# EAGLE board bb2 (EAGLE 6.5.0)
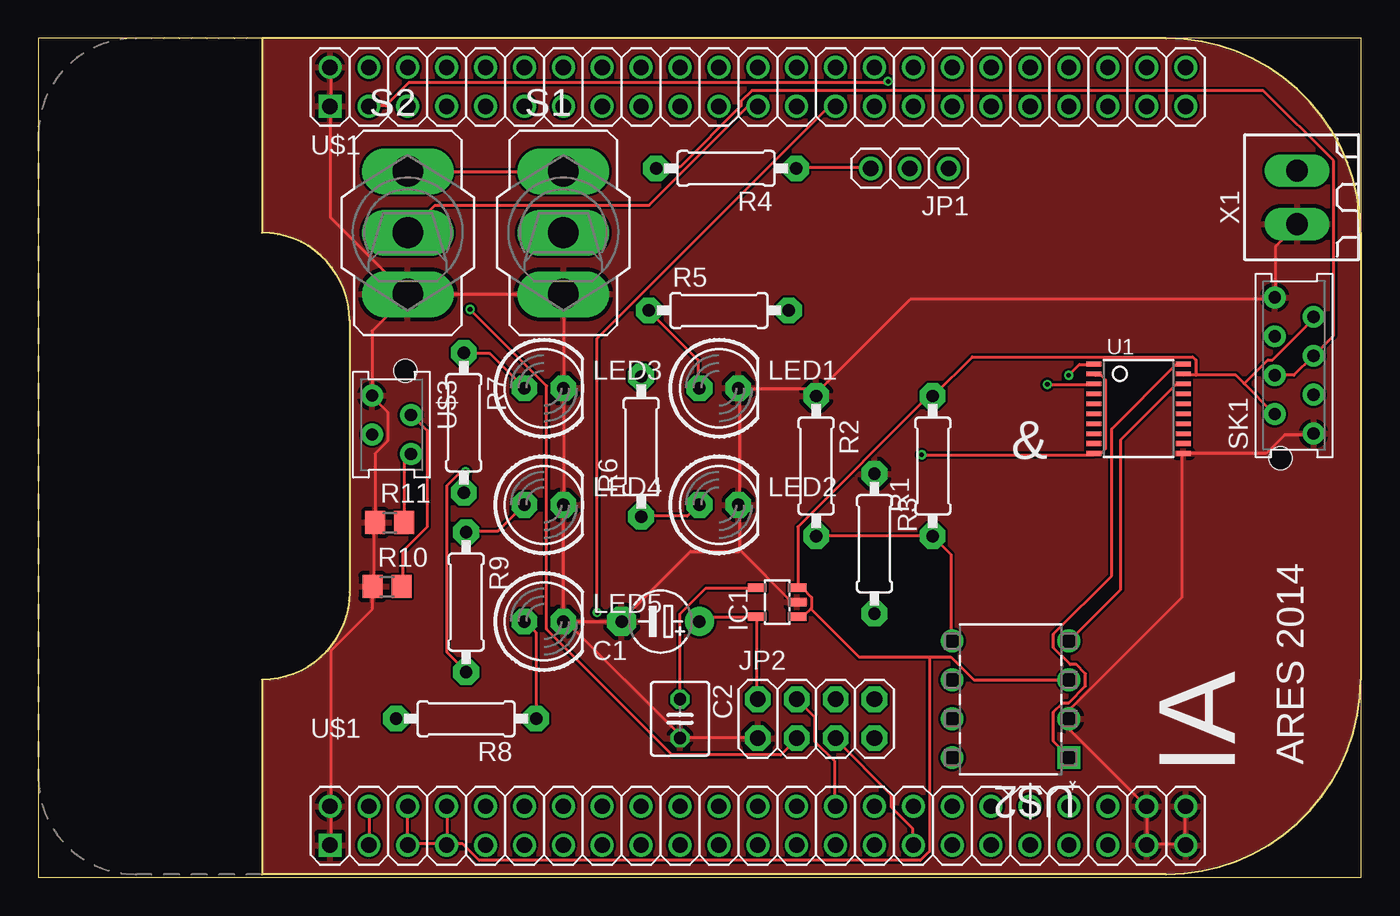
[diagram p0: board, top side]
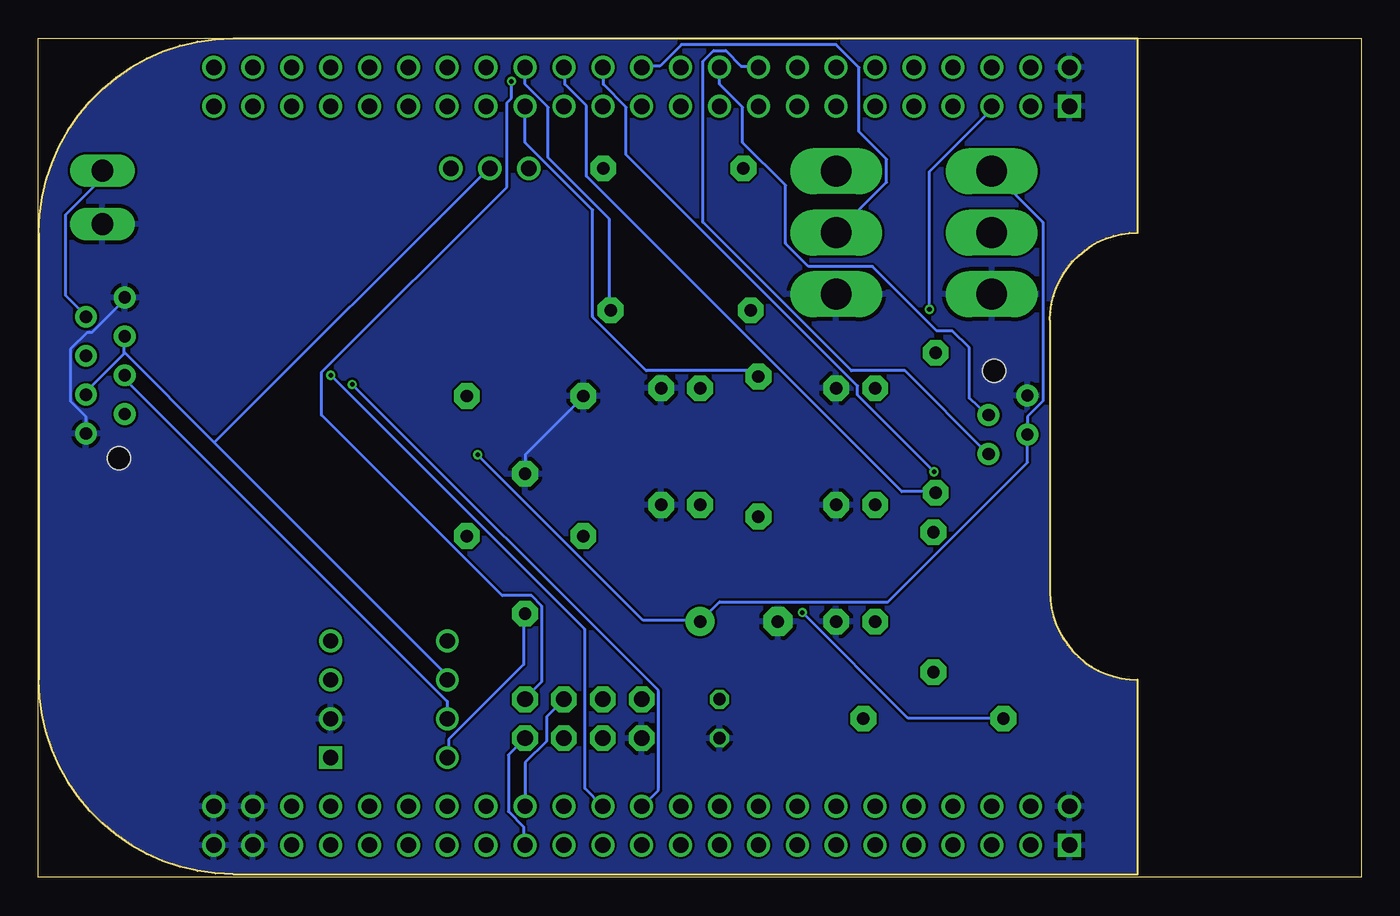
[diagram p1: board, bottom side, seen from below]

Size 86.4 x 54.81 mm. Coordinates in mm from the lower left corner, seen from the top.
Outline: 0,0 86.4,0 86.4,54.8 0,54.8 0,0
Copper layers (1*16): Top 0.035mm / dielectric 1.6mm / Bottom 0.035mm
Design rules "dipole *": minimum track width 0.2mm, minimum drill 0.3mm, track to track 0.15mm, track to pad 0.15mm, pad to pad 0.15mm, via to via 0.15mm, smd to smd 0.01mm, copper to edge 0.01mm, drill to drill 0.01mm, minimum pad ring 0.15mm, minimum via ring 0.15mm, stop-mask expansion 1mil, vias tented up to drill 0mil, thermal gap 10mil

## Footprints (pad centres in the part's own frame; a part is rotated, then mirrored left to right if it is on the bottom)
E5-4 = drill 0.813 pad 1.905: + -2.54,0 | drill 0.813 pad 1.905 octagon: - 2.54,0
C025-040X050 = drill 0.813 octagon: 1 -1.27,0; 2 1.27,0
SOT23-5 = smd 0.55 x 1.2: 1 -0.95,-1.3; 2 0,-1.3; 3 0.95,-1.3; 4 0.95,1.3; 5 -0.95,1.3
1X03 = drill 1.016: 1 -2.54,0; 2 0,0; 3 2.54,0
2X04 = drill 1.016 pad 1.676 octagon: 1 -3.81,-1.27; 2 -3.81,1.27; 3 -1.27,-1.27; 4 -1.27,1.27; 5 1.27,-1.27; 6 1.27,1.27; 7 3.81,-1.27; 8 3.81,1.27
LED5MM = drill 0.813 pad 1.676 octagon: A -1.27,0; K 1.27,0
0207/9 = drill 0.813 pad 1.676 octagon: 1 -4.572,0; 2 4.572,0
R0805 = smd 1.3 x 1.5: 1 -0.95,0; 2 0.95,0
320-916 = drill 2.007 long: 1 0,4.013; 2 0,0; 3 0,-4.013
AMP-215079-8 = drill 0.8 pad 1.422: 1 0,-1.27; 2 1.27,1.27; 3 2.54,-1.27; 4 3.81,1.27; 5 5.08,-1.27; 6 6.35,1.27; 7 7.62,-1.27; 8 8.89,1.27 | hole 1.5: -1.62,0.905
TSSOP20 = smd 0.305 x 0.991: 1 -2.925,-2.918; 2 -2.275,-2.918; 3 -1.625,-2.918; 4 -0.975,-2.918; 5 -0.325,-2.918; 6 0.325,-2.918; 7 0.975,-2.918; 8 1.625,-2.918; 9 2.275,-2.918; 10 2.925,-2.918; 11 2.925,2.918; 12 2.275,2.918; 13 1.625,2.918; 14 0.975,2.918; 15 0.325,2.918; 16 -0.325,2.918; 17 -0.975,2.918; 18 -1.625,2.918; 19 -2.275,2.918; 20 -2.925,2.918
BEAGLEBONE_SHIELD = drill 1 square: 1 4.445,19.05; 47 52.705,19.05 | drill 1: 2 1.905,19.05; 3 4.445,21.59; 4 1.905,21.59; 5 4.445,24.13; 6 1.905,24.13; 7 4.445,26.67; 8 1.905,26.67; 9 4.445,29.21; 10 1.905,29.21; 11 4.445,31.75; 12 1.905,31.75; 13 4.445,34.29; 14 1.905,34.29; 15 4.445,36.83; 16 1.905,36.83; 17 4.445,39.37; 18 1.905,39.37; 19 4.445,41.91; 20 1.905,41.91; 21 4.445,44.45; 22 1.905,44.45; 23 4.445,46.99; 24 1.905,46.99; 25 4.445,49.53; 26 1.905,49.53; 27 4.445,52.07; 28 1.905,52.07; 29 4.445,54.61; 30 1.905,54.61; 31 4.445,57.15; 32 1.905,57.15; 33 4.445,59.69; 34 1.905,59.69; 35 4.445,62.23; 36 1.905,62.23; 37 4.445,64.77; 38 1.905,64.77; 39 4.445,67.31; 40 1.905,67.31; 41 4.445,69.85; 42 1.905,69.85; 43 4.445,72.39; 44 1.905,72.39; 45 4.445,74.93; 46 1.905,74.93; 48 50.165,19.05; 49 52.705,21.59; 50 50.165,21.59; 51 52.705,24.13; 52 50.165,24.13; 53 52.705,26.67; 54 50.165,26.67; 55 52.705,29.21; 56 50.165,29.21; 57 52.705,31.75; 58 50.165,31.75; 59 52.705,34.29; 60 50.165,34.29; 61 52.705,36.83; 62 50.165,36.83; 63 52.705,39.37; 64 50.165,39.37; 65 52.705,41.91; 66 50.165,41.91; 67 52.705,44.45; 68 50.165,44.45; 69 52.705,46.99; 70 50.165,46.99; 71 52.705,49.53; 72 50.165,49.53; 73 52.705,52.07; 74 50.165,52.07; 75 52.705,54.61; 76 50.165,54.61; 77 52.705,57.15; 78 50.165,57.15; 79 52.705,59.69; 80 50.165,59.69; 81 52.705,62.23; 82 50.165,62.23; 83 52.705,64.77; 84 50.165,64.77; 85 52.705,67.31; 86 50.165,67.31; 87 52.705,69.85; 88 50.165,69.85; 89 52.705,72.39; 90 50.165,72.39; 91 52.705,74.93; 92 50.165,74.93
DIP254P762X432-8 = drill 0.991 square: 1 -7.62,7.62 | drill 0.991: 2 -7.62,5.08; 3 -7.62,2.54; 4 -7.62,0; 5 0,0; 6 0,2.54; 7 0,5.08; 8 0,7.62
AMP-215079-4 = drill 0.8 pad 1.422: 1 0,0; 2 1.27,2.54; 3 2.54,0; 4 3.81,2.54 | hole 1.5: -1.62,2.175
180G-2 = drill 1.422 long: 1 -1.75,0; 2 1.75,0

## Placement (x,y rotation side)
C1  2.2u  [E5-4]  40.64,16.71 180 top
C2  470p  [C025-040X050]  41.91,10.36 270 top
IC1  MIC5219BM5  [SOT23-5]  48.26,17.98 90 top
JP1  [1X03]  56.91,46.32 180 top
JP2  [2X04]  50.8,10.36 0 top
LED1  [LED5MM]  44.45,31.95 0 top
LED2  [LED5MM]  44.45,24.33 0 top
LED3  [LED5MM]  33.02,31.95 0 top
LED4  [LED5MM]  33.02,24.33 0 top
LED5  [LED5MM]  33.02,16.71 0 top
R1  47k  [0207/9]  58.42,26.87 90 top
R2  47k  [0207/9]  50.8,26.87 270 top
R3  4.7k  [0207/9]  54.61,21.79 270 top
R4  120  [0207/9]  44.92,46.31 180 top
R5  47k  [0207/9]  44.45,37.03 0 top
R6  47k  [0207/9]  39.37,28.14 90 top
R7  47k  [0207/9]  27.79,29.7 270 top
R8  47k  [0207/9]  27.94,10.36 180 top
R9  47k  [0207/9]  27.94,17.98 270 top
R10  10k  [R0805]  22.78,18.99 0 top
R11  10k  [R0805]  22.95,23.18 0 top
S1  [320-916]  34.29,42.11 0 top
S2  [320-916]  24.13,42.11 0 top
SK1  [AMP-215079-8]  82.02,28.99 90 top
U1  [TSSOP20]  71.86,30.61 270 top
U$1  BEAGLEBONE_OUTLINE  [BEAGLEBONE_SHIELD]  0,54.81 270 top
U$2  MCP2551-E/P  [DIP254P762X432-8]  59.69,15.44 180 top
U$3  MMATCH-4-  [AMP-215079-4]  21.8,31.47 270 top
X1  [180G-2]  82.21,44.42 90 top

## Library data of the parts
C1 C2 = resistor
IC1 = v-reg-micrel; MF: ALTERA CORPORATION; MPN: MIC5219BM5 TR; OC_FARNELL: 1100656; OC_NEWARK: 09J8939
JP1 JP2 LED1-LED5 R1-R9 U1 U$1 = adafruit
R10 R11 = rcl
S1 S2 = switch
SK1 U$3 = jt-con-micromatch
U$2 = mcp2551; MPN: MCP2551-E/P; OC_FARNELL: 1439745; OC_NEWARK: 69K7603; PACKAGE: DIP-8; SUPPLIER: Microchip
X1 = con-weidmueller-sl35; OC_FARNELL: unknown; OC_NEWARK: unknown

## Nets
AIN0: U$1.85
COULEUR: R11.2 U$1.18 U$3.4
DCAN1_RX: U1.3 U$1.70
DCAN1_TX: U1.1 U$1.72
GND: C1.- C2.2 IC1.2 JP2.1 LED1.K LED2.K LED3.K LED4.K LED5.K R2.1 R3.1 R10.1 R11.1 S1.3 S2.3 SK1.1 SK1.8 U1.11 U$1.1 U$1.2 U$1.47 U$1.48 U$1.89 U$1.90 U$1.91 U$1.92 U$2.2 U$3.1 X1.1
N$1: R1.1 R2.2 U$2.5
N$2: JP1.3 R4.1
N$3: R3.2 U$2.8
N$4: C2.1 IC1.4
N$5: R5.2 U$1.30
N$6: R6.2 U$1.29
N$7: R7.2 U$1.28
N$9: R9.2 U$1.26
N$10: LED5.A R8.1
N$11: S1.2 U$1.24
N$12: S2.2 U$1.23
N$13: R8.2 U$1.27
N$15: JP1.2 SK1.3 SK1.6 U$2.6
N$16: R4.2 SK1.4 SK1.5 U$2.7
N$19: LED2.A R6.1
N$20: LED1.A R5.1
N$21: LED3.A R7.1
N$22: LED4.A R9.1
RXD: U1.18 U$2.4
SPI_CE: JP2.3 U$1.5
SPI_CS: JP2.4 U$1.74
SPI_IRQ: JP2.8 U$1.3
SPI_MISO: JP2.7 U$1.75
SPI_MOSI: JP2.6 U$1.76
SPI_SCLK: JP2.5 U$1.77
TIRETTE: R10.2 U$1.20 U$3.2
TXD: U1.20 U$2.1
VDD: IC1.1 IC1.3 R1.2 SK1.2 SK1.7 U1.19 U$1.51 U$1.52 U$1.53 U$1.54 U$2.3 X1.2
VDD_3V3: C1.+ IC1.5 JP2.2 S1.1 S2.1 U1.2 U1.10 U$3.3
VDD_3V3EXP: U$1.49 U$1.50

## Tracks (layer width: path | path; a pad name or v marks a point on that pad's centre or on a via)
COULEUR
  Top 0.2: R11.2 23.9,27.2 24.3,27.6 U$3.4
  Bottom 0.2: U$1.18 39.4,53 40.5,53 41.5,54 42.3,54 43,53.3 43,42.8 33.3,33.1 29.8,33.1 24.4,27.7 U$3.4
DCAN1_RX  (via drill 0.3)
  Top 0.2: v65.9,32.2 68.9,32.2 U1.3
  Bottom 0.2: v65.9,32.2 45.9,12.2 45.9,5.7 46.9,4.7 U$1.70
DCAN1_TX  (via drill 0.3)
  Top 0.2: v67.3,32.8 68,33.5 68.9,33.5 U1.1
  Bottom 0.2: v67.3,32.8 50.7,16.2 50.7,5.8 49.6,4.7 U$1.72
GND
  Top 0.2: U$1.92 74.9,4.6 74.9,2.3 U$1.91 74.9,2.2 72.5,2.2 U$1.89 72.4,2.2 72.4,4.6 U$1.90 72.3,4.7 67.4,9.6 67.4,10.3 U$2.2 67.4,10.4 67.4,11 74.7,18.3 74.7,27.6 U1.11 74.8,27.7 80.2,27.7 81.4,28.9 83.2,28.9 SK1.1 | X1.1 82.2,42.6 80.8,41.2 80.8,37.9 SK1.8 80.7,37.8 57,37.8 50.8,31.6 R2.1 50.8,31.5 50.4,31.9 45.8,31.9 LED1.K 45.8,31.8 45.8,24.4 LED2.K 45.8,24.3 45.8,21.4 45.85,21.35 | 45.85,21.35 49.2,18 49.5,18 IC1.2 | JP2.1 46.9,9.1 42,9.1 C2.2 42,9.2 34.5,16.7 | 34.5,16.7 C1.- 38.1,16.8 42.6,21.3 45.8,21.3 45.85,21.35 | 34.5,16.7 LED5.K | 34.5,16.7 LED5.K | LED5.K 34.3,16.8 34.3,24.3 LED4.K 34.3,24.4 34.3,31.9 LED3.K 34.3,32 34.3,38 S1.3 34.2,38.1 24.2,38.1 S2.3 | U$1.2 19.1,52.9 19.1,50.4 U$1.1 19.1,50.3 19.1,43.1 24.1,38.1 S2.3 | U$1.47 19.1,2.2 19.1,4.6 U$1.48 19.1,4.7 19.1,14.8 21.8,17.5 21.8,18.9 R10.1 21.9,19 21.9,23 22,23.1 R11.1 22,27.7 22.8,28.5 22.8,30.4 21.8,31.4 U$3.1 21.8,35.7 24.1,38 S2.3
  Bottom 0.2: SK1.1 83.3,30.1 84.3,31.1 84.3,34.5 83.2,35.6 82.9,35.6 80.7,37.8 SK1.8 | R3.1 54.6,26.4 54.6,27.6 50.8,31.4 R2.1
  pour Top: -4.8,61.3 90.3,61.3 90.3,-4.2 -4.8,-4.2
  pour Bottom: -5.9,64.9 94.8,64.9 94.8,-6.6 -5.9,-6.6
N$1
  Top 0.2: U$2.5 59.6,15.5 59.6,21.1 58.5,22.2 R1.1 58.4,22.3 R2.2
N$2
  Top 0.2: JP1.3 54.3,46.4 49.5,46.4 R4.1
N$3
  Bottom 0.2: U$2.8 59.6,7.9 59.6,9 54.7,13.9 54.7,17.2 R3.2
N$4
  Top 0.2: IC1.4 46.9,18.9 43.6,18.9 41.9,17.2 41.9,11.7 C2.1
N$5
  Bottom 0.2: U$1.30 54.6,51.8 53.1,50.3 53.1,47 49.1,43 49.1,37.1 R5.2
N$6
  Bottom 0.2: U$1.29 54.6,50.3 54.6,48 50.2,43.6 50.2,36.6 46.7,33.1 39.7,33.1 39.4,32.8 R6.2
N$7
  Bottom 0.2: U$1.28 52,52.9 52,51.8 50.6,50.4 50.6,45.8 30,25.2 27.8,25.2 R7.2
N$9  (via drill 0.3)
  Top 0.2: v27.9,26.5 27.6,26.5 26.7,25.6 26.7,14.7 27.9,13.5 R9.2
  Bottom 0.2: v27.9,26.5 32.9,31.5 32.9,32.1 48,47.2 48,50.3 49.5,51.8 49.5,52.9 U$1.26
N$10
  Top 0.2: R8.1 32.5,10.4 32.5,16 31.8,16.7 LED5.A
N$11
  Bottom 0.2: S1.2 31,45.4 31,46.9 32.8,48.7 32.8,52.9 34.3,54.4 44.4,54.4 45.8,53 46.9,53 U$1.24
N$12
  Top 0.2: U$1.23 46.9,50.3 46.3,50.3 39.9,43.9 25.9,43.9 24.2,42.2 S2.2
N$13  (via drill 0.3)
  Top 0.2: v36.5,17.3 36.5,35.2 51.6,50.3 52,50.3 U$1.27
  Bottom 0.2: v36.5,17.3 29.6,10.4 23.4,10.4 R8.2
N$15
  Bottom 0.2: 80.8,34.3 80.8,34.2 83.2,31.8 83.2,31.6 SK1.3 | 80.8,34.3 80.8,35.3 SK1.6 | 80.8,34.3 74.9,28.4 | 74.9,28.4 59.7,13.2 U$2.6 | 74.9,28.4 57,46.3 JP1.2
N$16
  Top 0.2: SK1.4 82,32.8 83.2,34 SK1.5 83.3,34.1 84.6,35.4 84.6,46.8 80,51.4 46.6,51.4 45.9,50.7 45.9,50.4 41.9,46.4 40.4,46.4 R4.2
  Bottom 0.2: U$2.7 59.7,10.4 59.7,11.5 80.7,32.5 80.7,32.8 SK1.4
N$19
  Top 0.2: R6.1 39.4,23.6 42.4,23.6 43.1,24.3 LED2.A
N$20
  Top 0.2: LED1.A 43.1,32 43.1,33.8 39.9,37 R5.1
N$21
  Top 0.2: LED3.A 29.5,34.2 27.8,34.2 R7.1
N$22
  Top 0.2: R9.1 28,22.6 30,22.6 31.7,24.3 LED4.A
RXD
  Top 0.2: U1.18 74.7,32.2 74.3,32.2 70.7,28.6 70.7,18.8 67.4,15.5 U$2.4
SPI_CE  (via drill 0.3)
  Top 0.2: v28.2,37.1 33.2,32.1 33.2,16.2 41.4,8 48.5,8 49.5,9 JP2.3
  Bottom 0.2: v28.2,37.1 28.2,46.1 24.2,50.1 24.2,50.3 U$1.5
SPI_CS
  Top 0.2: U$1.74 52,4.7 52,7.6 50.7,8.9 50.7,10.5 49.6,11.6 JP2.4
SPI_IRQ  (via drill 0.3)
  Top 0.2: v55.5,52 55.4,51.9 24.2,51.9 22.7,50.4 21.6,50.4 U$1.3
  Bottom 0.2: v55.5,52 55.5,50.9 55.8,50.6 55.8,45.1 67.9,33 67.9,30.2 56.1,18.4 54.2,18.4 53.5,17.7 53.5,12.8 54.6,11.7 JP2.8
SPI_MISO
  Bottom 0.2: JP2.7 55.7,8 55.7,4.3 54.7,3.3 54.7,2.2 U$1.75
SPI_MOSI
  Bottom 0.2: JP2.6 53.2,10.5 53.2,8.9 54.6,7.5 54.6,4.7 U$1.76
SPI_SCLK
  Top 0.2: U$1.77 57.1,2.2 57.1,3.2 55.7,4.6 55.7,5.4 52.1,9 JP2.5
TIRETTE
  Top 0.2: R10.2 23.8,19 23.8,21.3 25.4,22.9 25.4,29.2 24.4,30.2 U$3.2
  Bottom 0.2: U$1.20 41.9,51.8 40.4,50.3 40.4,48 37.6,45.2 37.6,41.4 36.1,39.9 31.91,39.9 27.71,35.7 26.7,35.7 25.6,34.6 25.6,31.3 24.4,30.2 U$3.2
TXD
  Top 0.2: U1.20 74.7,33.5 74.3,33.5 70.1,29.3 70.1,19.7 66.3,15.9 66.3,15 67.4,13.9 67.8,13.9 68.4,13.3 68.4,12.5 67.3,11.4 66.9,11.4 66.3,10.8 66.3,8.9 67.3,7.9 U$2.1
VDD
  Top 0.2: 75.6,32.8 78.2,32.8 78.75,32.25 | 75.6,32.8 74.8,32.8 U1.19 | 78.75,32.25 80.7,30.3 SK1.2 | 78.75,32.25 80.3,33.8 80.6,33.8 83.2,36.4 83.2,36.6 SK1.7 | U$1.52 24.1,4.6 24.1,2.2 U$1.51 24.2,2.2 26.6,2.2 U$1.53 | U$1.53 26.7,2.2 26.7,4.6 U$1.54 | 50.45,17.55 50.5,17.6 50.5,18.3 49.9,18.9 49.6,18.9 IC1.3 49.6,19 49.6,22.9 58.1,31.4 58.4,31.4 R1.2 58.5,31.5 61,34 75.4,34 75.6,33.8 75.6,32.8 | 50.45,17.55 50,17.1 49.6,17.1 IC1.1 | U$2.3 61.1,12.9 59.6,14.4 58.2,14.4 | 58.2,14.4 53.6,14.4 50.45,17.55 | 58.2,14.4 58.2,1.7 57.6,1.1 28.8,1.1 27.7,2.2 26.8,2.2 U$1.53
  Bottom 0.2: X1.2 82.3,46.1 82.3,45.6 84.6,43.3 84.6,38 83.3,36.7 SK1.7
VDD_3V3  (via drill 0.3)
  Top 0.2: S1.1 34.2,46.1 24.2,46.1 S2.1 | U1.2 69,32.8 69.4,32.8 69.7,32.5 69.7,28 69.4,27.7 69,27.7 U1.10 68.9,27.6 v57.7,27.6 | C1.+ 43.2,16.8 43.4,17 46.9,17 IC1.5 46.9,16.9 46.9,11.7 JP2.2
  Bottom 0.2: S2.1 24.1,46.1 20.8,42.8 20.8,31.1 21.8,30.1 U$3.3 21.8,27.1 30.9,18 41.9,18 43.1,16.8 C1.+ 43.2,16.8 46.9,16.8 v57.7,27.6
VDD_3V3EXP
  Top 0.2: U$1.49 21.6,2.2 21.6,4.6 U$1.50

## Text on the board
tPlace: & | IA | ARES 2014
200bmp: C:/Users/Cedric/Google Drive/Mes Documents/GitHub/Robot-2013-2014/cartes/outils/logo_ares_3.bmp | C:/Users/Cedric/Google Drive/Mes Documents/GitHub/Robot-2013-2014/cartes/outils/logo_dipole_monochrome_petit_droit.bmp